# Allegro board ESP32_ENTREGABLE_1B_VILLARREAL_HERNANDEZ_707560.brd
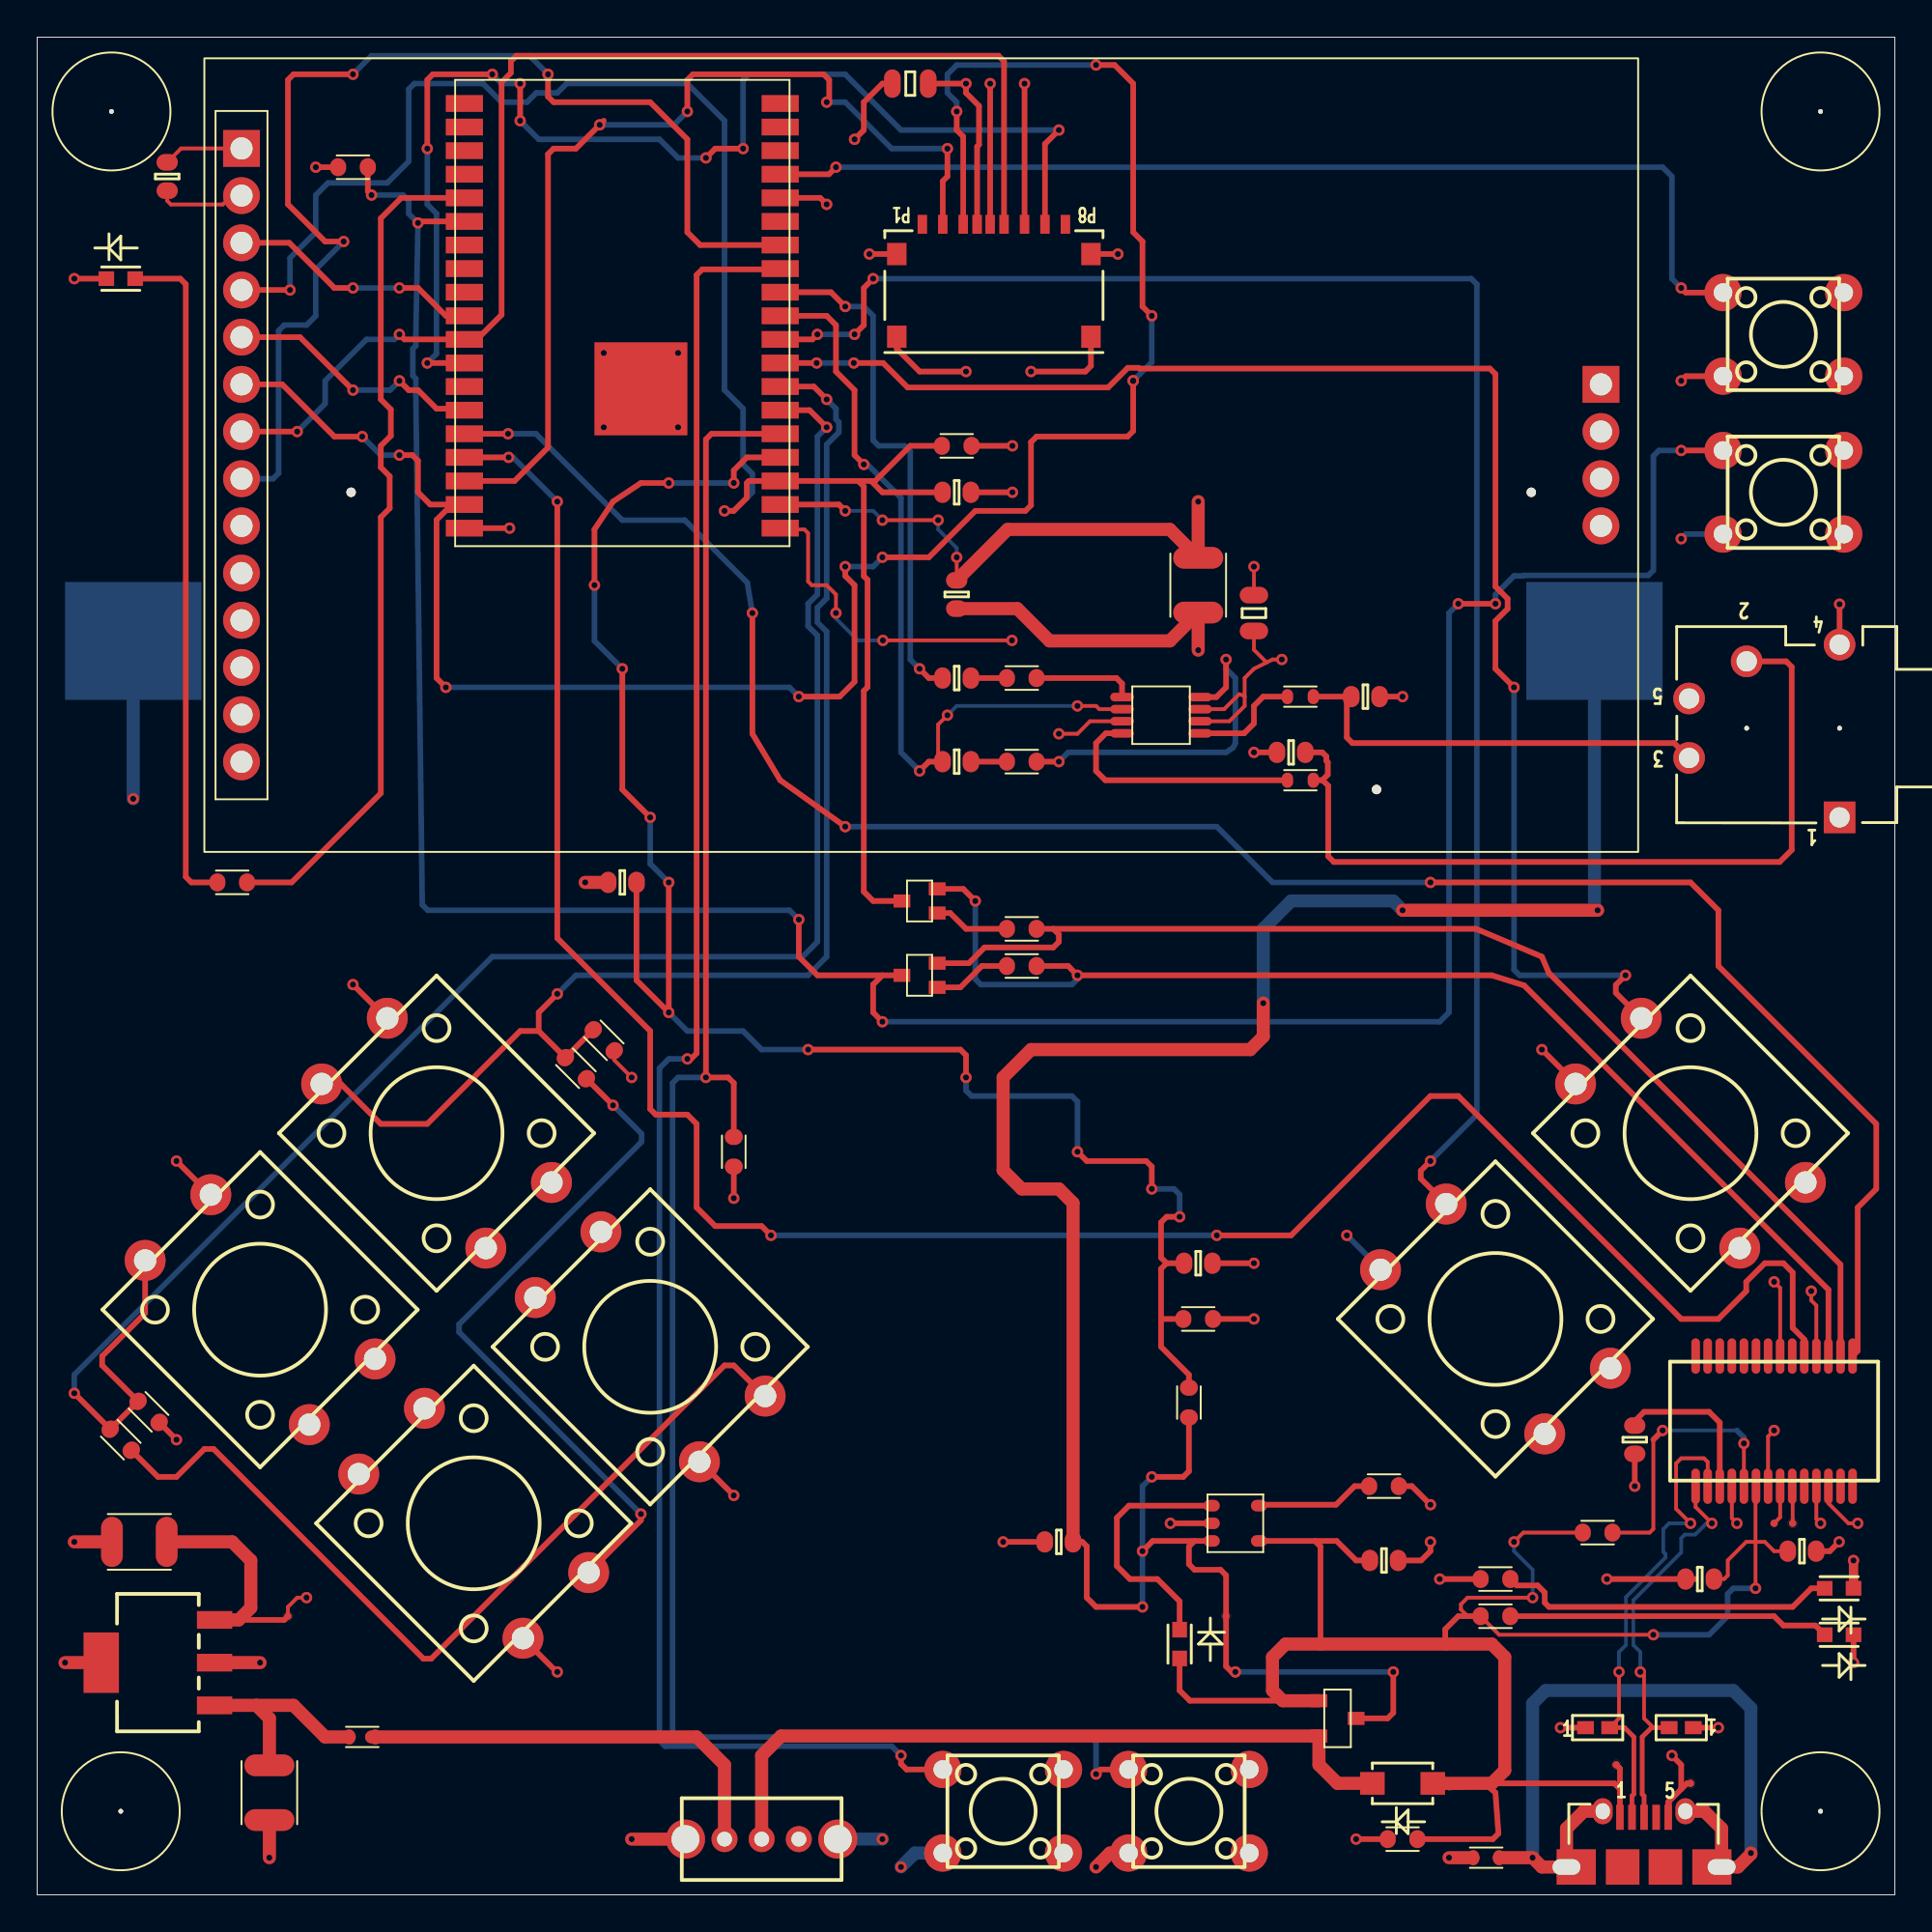
[diagram p0: board, top side]
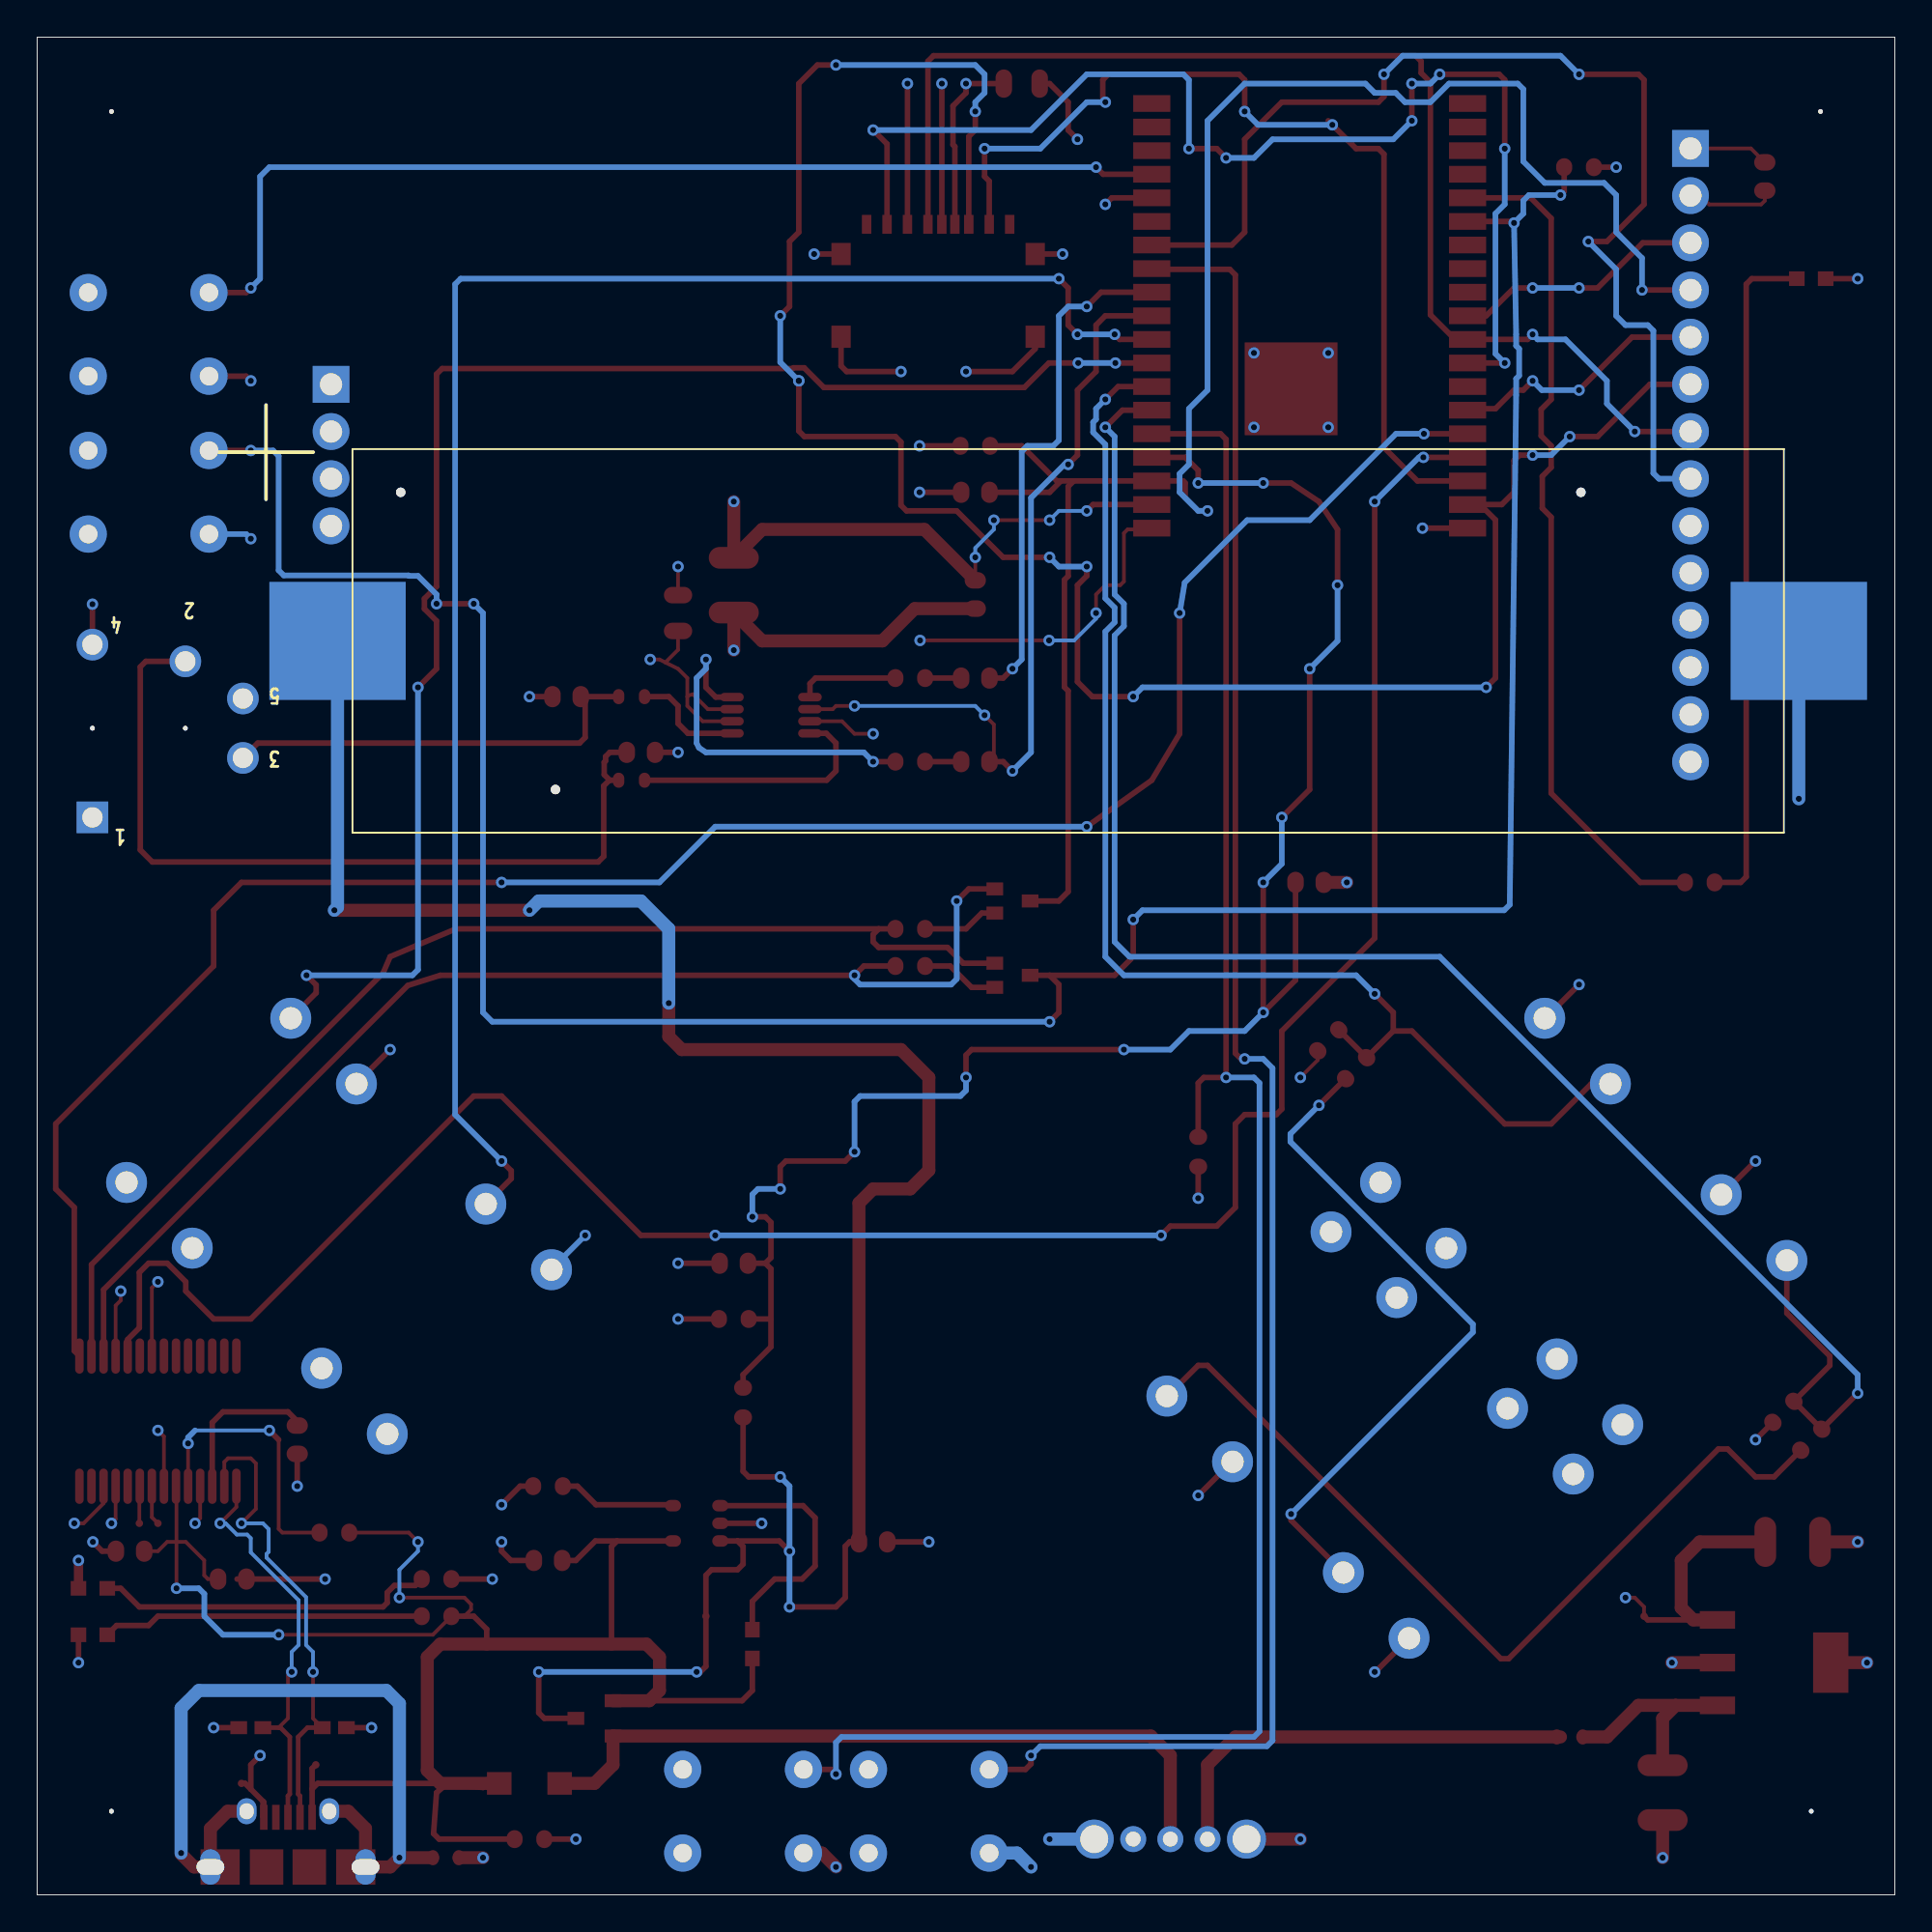
[diagram p1: board, bottom side, seen from below]

Outline 100 x 100 mm; copper layers: TOP, LAYER2, LAYER3, BOTTOM. Coordinates in mm from the lower left corner of the outline.
Outline path: 0,100 0,0 100,0 100,100 0,100

## Design rules (mm)
constraint set DEFAULT: 
net group USB_D: nets USB_DN USB_DP
net group EC_AUDIO: nets AUDIO_IN+ AUDIO_IN+_R AUDIO_IN- AUDIO_IN-_R AUDIO_OUT+ AUDIO_OUT+_L AUDIO_OUT- AUDIO_OUT-_L
net group EC_MISC: nets CBUS0 CBUS1 FT232_RST IO0 IO2 IO4 IO12 IO13 IO14 IO15 IO21 IO25 IO26 IO27 IO32 IO33 IO34 IO34_R IO35 IO35_R IO36 IO39 ISEN_CHRGR RESET STATUS_LED
net group EC_UART: nets DTR_N DTR_N_R RTS_N RTS_N_R UART_RXD UART_TXD
net group GND: nets GND_SHLD
net group MG_SPI: nets SPI_CS0 SPI_CS1 SPI_MISO SPI_MOSI SPI_SCK
net group PWR: nets FT232_P3V3OUT P3V7_VBAT P5V0_P3V7 P5V0_P3V7_IN P5V0_P3V7_L P5V0_USB

## Placement (name value [footprint] x y rotation side)
C1  0.1uF  [CC0603_OV]  62.5 34 180 top
C2  0.1uF  [CC0603_OV]  55 19 0 top
C3  47uF  [CC1210_OV]  12.5 5.5 90 top
C4  47uF  [CC1210_OV]  5.5 19 0 top
C5  4.7uF  [CC0603_OV]  72.5 18 180 top
C6  47uF  [CC1210_OV]  62.5 70.5 90 top
C7  0.1uF  [CC0603_OV]  49.5 70 90 top
C8  0.1uF  [CC0603_OV]  31.5 54.5 0 top
C9  0.1uF  [CC0603_OV]  49.5 75.5 180 top
C11  4.7uF  [CC0603_OV]  95 18.5 180 top
C12  0.1uF  [CC0603_OV]  89.5 17 0 top
C13  0.1uF  [CC0603_OV]  86 24.5 270 top
C15  10uF  [CC0805_OV]  47 97.5 0 top
C16  0.1uF  [CC0603_OV]  7 92.5 90 top
C18  0.1uF  [CC0603_OV]  49.5 65.5 0 top
C19  0.1uF  [CC0603_OV]  49.5 61 0 top
C20  220pF  [CC0603_OV]  71.5 64.5 180 top
C21  220pF  [CC0603_OV]  67.5 61.5 0 top
C22  10uF  [CC0805_OV]  65.5 69 270 top
D1  598-8060-107F  [LED_0603]  61.5 13.5 90 top
D2  MBR120VLSFT1G  [SOD-123]  73.5 6 180 top
D3  0402ESDA-MLP1  [0402_MLP]  88.5 9 180 top
D4  0402ESDA-MLP1  [0402_MLP]  84 9 0 top
D5  598-8060-107F  [LED_0603]  4.5 87 180 top
D6  598-8010-107F  [LED_0603]  97 16.5 0 top
D7  598-8010-107F  [LED_0603]  97 14 0 top
J1  47589-0001  [CON5_MICROUSB]  86.5 1.5 0 top
J2  SJ-43515TS  [CON5_AUD_JACK_RA_TH_SJ-43515TS]  97.02 58 180 top
J4  2.4" 240x320 SPI TFT ILI9341 with SD  [TFT_2P4_INCH_18PIN]  11 77.5 0 top
J5  1050270001  [CON8_SDCARD_PUSH_SM]  51.5 86 180 top
J6  1042P  [1042P_BAT_HLDR]  44.5 67.5 0 bottom
L1  330  [L0603_OV]  17.5 8.5 180 top
L2  330  [L0603_OV]  78 2 0 top
L3  330  [L0603_OV]  68 64.5 180 top
L4  330  [L0603_OV]  68 60 180 top
NOREF  -  [unnamed]  4.5 4.5 0 top
NOREF#2  -  [unnamed]  4 96 0 top
NOREF#3  -  [unnamed]  96 96 0 top
NOREF#4  -  [unnamed]  96 4.5 0 top
Q1  SSF1341  [SOT23-3]  70 9.5 0 top
Q2  MMBT3904WT1G  [SOT323]  47.5 53.5 180 top
Q3  MMBT3904WT1G  [SOT323]  47.5 49.5 180 top
R1  2K  [R0603_OV]  72.5 22 180 top
R2  2K  [R0603_OV]  78.5 15 0 top
R3  2K  [R0603_OV]  78.5 17 0 top
R4  100K  [R0603_OV]  62 26.5 270 top
R5  100K  [R0603_OV]  62.5 31 180 top
R6  100K  [R0603_OV]  73.5 3 0 top
R7  10K  [R0603_OV]  49.5 78 0 top
R8  10K  [R0603_OV]  53 52 0 top
R9  10K  [R0603_OV]  53 50 0 top
R10  2K  [R0603_OV]  10.5 54.5 180 top
R14  10K  [R0603_OV]  84 19.5 180 top
R15  100K  [R0603_OV]  53 61 0 top
R16  100K  [R0603_OV]  53 65.5 0 top
R17  10K  [R0603_OV]  30.5 46 135 top
R18  10K  [R0603_OV]  29 44.5 135 top
R19  10K  [R0603_OV]  6 26 135 top
R20  10K  [R0603_OV]  4.5 24.5 135 top
R21  10K  [R0603_OV]  37.5 40 270 top
R22  10K  [R0603_OV]  17 93 180 top
SW1  OS102011MA1QN1  [SLIDE_SWITCH]  39 3 90 top
SW2  DTS-21N-V  [SWITCH_12X12]  21.5 41 315 top
SW3  DTS-21N-V  [SWITCH_12X12]  23.5 20 135 top
SW4  DTS-21N-V  [SWITCH_12X12]  12 31.5 315 top
SW5  DTS-21N-V  [SWITCH_12X12]  33 29.5 135 top
SW6  PTS645SH432LFS  [SWITCH_6X6]  94 84 0 top
SW7  PTS645SH432LFS  [SWITCH_6X6]  94 75.5 0 top
SW8  PTS645SH432LFS  [SWITCH_6X6]  52 4.5 0 top
SW9  PTS645SH432LFS  [SWITCH_6X6]  62 4.5 0 top
SW10  DTS-21N-V  [SWITCH_12X12]  78.5 31 315 top
SW11  DTS-21N-V  [SWITCH_12X12]  89 41 315 top
TP1  TestPoint 40  [TP]  89 6 0 top
TP2  TestPoint 40  [TP]  85 7 0 top
TP3  TestPoint 40  [TP]  64 15 0 top
TP4  TestPoint 40  [TP]  13.5 15 0 top
TP5  TestPoint 40  [TP]  93.5 20 0 top
TP6  TestPoint 40  [TP]  94.5 20 0 top
U4  FT232R  [SSOP28]  93.5 25.5 270 top
U6  XC6802A42XMR-G  [SOT23-5]  64.5 20 0 top
U7  MCP1825ST-3302E/DB  [SOT223-4A]  6.5 12.5 180 top
U8  ESP32-WROVER-B (16Mb)  [LCC39_WROVERB]  31.5 85 180 top
U9  PAM8304ASR  [MSOP8]  60.5 63.5 180 top

## Library data of the parts
C1 C2 C7-C9 C12 C13 C16 C18 C19 = CAP SMD 0.1uF 16V 10% X7R 0603
C3 C4 C6 = CAP SMD 47uF 16V 20% X5R 1210
C5 C11 = CAP SMD 4.7uF 16V 10% X7S 0603
C15 C22 = CAP SMD 10uF 10V X7R 0805
C20 C21 = CAP SMD 220pF 50V 10% X7R 0603
D1 D5-D7 = LED SMD YLW/GRN 0603
D2 = DIODE MBR120VLSFT1G SOD123
D3 D4 = DIODE TVS BIDIR 0402
J1 = CONN Micro USB Type AB
J2 = Audio Jack 3.5mm SJ-43515TS
J4 = TFT2.4_SPI_18pin
J5 = CON8_SDCARD_SW_0
J6 = 1042P_BATTERY_HOLDER
L1-L4 = IND FER-BEAD 330 1.7A 0603
Q1 = TRANS P-CH 12V 3_3.5A SOT23
Q2 Q3 = TRANS BJT NPN 40V 0_0.2A SOT323
R1-R3 R10 = RES SMD 2K 5% 0_0.1W 0603
R4-R6 R15 R16 = RES SMD 100K 5% 0_1.1W 0603
R7-R9 R14 R17-R22 = RES SMD 10K 5% 0_1.25W 0603
SW1 = SW OS102011MA1QN1
SW2-SW5 SW10 SW11 = PUSHBUTTON_DTS-21N-V_12X12
SW6-SW9 = PUSHBUTTON_PTS645SH432LFS_6x6
TP1-TP6 = TestPoint 40_0
U4 = TMP_0
U6 = XC6802A42XMR-G_0
U7 = MCP1825S
U8 = ESP32_WROVER-B_2
U9 = PAM8304ASR

## Footprints (pads in the part's own frame, mm; a bottom-side part is the same pattern mirrored in y, then rotated)
0402_MLP
  rect 0.9x0.7 smd: 1(-0.65,0) 2(0.65,0)
1042P_BAT_HLDR
  round 0.5 hole 3.45: (-27.6,-8) (27.6,8)
  round 0.5 hole 3: (35.93,-8)
  rect 7.34x6.35 smd: 1(-39.33,0) 2(39.33,0)
CC0603_OV
  oval 0.889x1.143 smd: 1(-0.762,0) 2(0.762,0)
CC0805_OV
  oval 0.889x1.524 smd: 1(-0.965,0) 2(0.965,0)
CC1210_OV
  oval 1.168x2.692 smd: 1(-1.473,0) 2(1.473,0)
CON5_AUD_JACK_RA_TH_SJ-43515TS
  round 0.254 hole 1.092 unplated: (0,-4.8) (5,-4.8)
  rect 1.702x1.702 hole 1.092: 1(0,0)
  round 1.702 hole 1.092: 2(5,-8.4) 3(8.1,-3.2) 4(0,-9.3) 5(8.1,-6.4)
CON5_MICROUSB
  rect 1.803x1.905 smd: (-1.15,0) (1.15,0)
  rect 0.406x1.346 smd: 1(-1.3,2.675) 2(-0.65,2.675) 3(0,2.675) 4(0.65,2.675) 5(1.3,2.675)
  oval 1.067x1.397 hole 0.762x0.864: S1(-2.225,3) S2(2.225,3)
  rect 2.108x1.905 hole 1.499x0.838: S3(-4.175,0) S4(4.175,0)
CON8_SDCARD_PUSH_SM
  rect 0.508x1.016 smd: G1(0.2,-3.925) P1(3.85,-3.925) P2(2.75,-3.925) P3(1.65,-3.925) P4(0.9,-3.925) P5(-0.55,-3.925) P6(-1.65,-3.925) P7(-2.75,-3.925) P8(-3.85,-3.925)
  rect 1.041x1.194 smd: S1(5.225,-2.325) S2(5.225,2.125) S3(-5.225,2.125) S4(-5.225,-2.325)
L0603_OV
  oval 0.61x0.813 smd: 1(-0.698,0) 2(0.698,0)
LCC39_WROVERB
  rect 2x0.9 smd: 1(-8.5,11.43) 2(-8.5,10.16) 3(-8.5,8.89) 4(-8.5,7.62) 5(-8.5,6.35) 6(-8.5,5.08) 7(-8.5,3.81) 8(-8.5,2.54) 9(-8.5,1.27) 10(-8.5,0) 11(-8.5,-1.27) 12(-8.5,-2.54) 13(-8.5,-3.81) 14(-8.5,-5.08) 15(-8.5,-6.35) 16(-8.5,-7.62) 17(-8.5,-8.89) 18(-8.5,-10.16) 19(-8.5,-11.43) 20(8.5,-11.43) 21(8.5,-10.16) 22(8.5,-8.89) 23(8.5,-7.62) 24(8.5,-6.35) 25(8.5,-5.08) 26(8.5,-3.81) 27(8.5,-2.54) 28(8.5,-1.27) 29(8.5,0) 30(8.5,1.27) 31(8.5,2.54) 32(8.5,3.81) 33(8.5,5.08) 34(8.5,6.35) 35(8.5,7.62) 36(8.5,8.89) 37(8.5,10.16) 38(8.5,11.43)
  rect 5x5 smd: 39(-1,3.93)
LED_0603
  rect 0.838x0.787 smd: A(-0.775,0) C(0.775,0)
MSOP8
  oval 1.27x0.46 smd: 1(-2.1,0.975) 2(-2.1,0.325) 3(-2.1,-0.325) 4(-2.1,-0.975) 5(2.1,-0.975) 6(2.1,-0.325) 7(2.1,0.325) 8(2.1,0.975)
R0603_OV
  oval 0.864x0.965 smd: 1(-0.8,0) 2(0.8,0)
SLIDE_SWITCH
  round 1.4 hole 0.8: 1(0,2) 2(0,0) 3(0,-2)
  round 2.1 hole 1.5: MH1(0,4.1) MH2(0,-4.1)
SOD-123
  rect 1.321x1.219 smd: A(-1.626,0) C(1.626,0)
SOT23-3
  rect 0.9x0.7 smd: 1(-1,0.95) 2(-1,-0.95) 3(1,0)
SOT23-5
  oval 0.87x0.62 smd: 1(-1.275,0.95) 2(-1.275,0) 3(-1.275,-0.95) 4(1.275,-0.95) 5(1.275,0.95)
SOT223-4A
  rect 1.9x0.95 smd: 1(-3.05,2.3) 2(-3.05,0) 3(-3.05,-2.3)
  rect 1.9x3.25 smd: 4(3.05,0)
SOT323
  rect 0.9x0.7 smd: 1(-0.95,0.65) 2(-0.95,-0.65) 3(0.95,0)
SSOP28
  oval 1.9x0.46 smd: 1(-3.505,4.225) 2(-3.505,3.575) 3(-3.505,2.925) 4(-3.505,2.275) 5(-3.505,1.625) 6(-3.505,0.975) 7(-3.505,0.325) 8(-3.505,-0.325) 9(-3.505,-0.975) 10(-3.505,-1.625) 11(-3.505,-2.275) 12(-3.505,-2.925) 13(-3.505,-3.575) 14(-3.505,-4.225) 15(3.505,-4.225) 16(3.505,-3.575) 17(3.505,-2.925) 18(3.505,-2.275) 19(3.505,-1.625) 20(3.505,-0.975) 21(3.505,-0.325) 22(3.505,0.325) 23(3.505,0.975) 24(3.505,1.625) 25(3.505,2.275) 26(3.505,2.925) 27(3.505,3.575) 28(3.505,4.225)
SWITCH_6X6
  round 2 hole 1: 1(-3.25,2.25) 2(3.25,2.25) 3(-3.25,-2.25) 4(3.25,-2.25)
SWITCH_12X12
  round 2.2 hole 1.2: 1(-6.25,2.5) 2(6.25,2.5) 3(-6.25,-2.5) 4(6.25,-2.5)
TFT_2P4_INCH_18PIN
  rect 1.981x1.981 hole 1.194: 1(0,16.51) 15(73.18,3.81)
  round 1.981 hole 1.194: 2(0,13.97) 3(0,11.43) 4(0,8.89) 5(0,6.35) 6(0,3.81) 7(0,1.27) 8(0,-1.27) 9(0,-3.81) 10(0,-6.35) 11(0,-8.89) 12(0,-11.43) 13(0,-13.97) 14(0,-16.51) 16(73.18,1.27) 17(73.18,-1.27) 18(73.18,-3.81)
TP
  round 0.4 smd: 1(0,0)
unnamed
  round 0.254 hole 3.175 unplated: (0,0)

## Nets
GND: C1.1 C2.1 C3.1 C4.1 C5.1 C6.1 C7.1 C8.1 C9.1 C11.1 C12.1 C13.2 C15.1 C16.1 C20.1 C21.1 C22.1 D3.1 D4.1 D5.C(CATHODE) D6.C(CATHODE) D7.C(CATHODE) J1.5 J2.4 J4.2 J5.G1 J5.P6(VSS) J5.S1 J5.S2 J5.S3 J5.S4 J6.1(-) L2.1 R1.1 R5.1 R6.1 R17.1 R19.1 SW1.MH1 SW1.MH2 SW6.3 SW7.3 SW8.3 SW9.3 SW10.3 SW11.3 TP1.1(PIN1) U4.7 U4.18 U4.21 U4.25 U4.26 U6.2 U7.2 U7.4 U8.1 U8.15 U8.38 U8.39 U9.7
GND_SHLD: J1.S1 J1.S2 J1.S3 J1.S4(SHLD4) L2.2
P3V3: C4.2 C6.2 C7.2 C15.2 C16.2 C22.2 J4.1(VCC) J5.P4 R3.1 R7.2 R21.2 R22.2 SW2.1 SW3.1 SW4.1 SW5.1 TP4.1(PIN1) U4.4(VCCIO) U7.3(VOUT) U8.2 U9.2 U9.3
P3V7_VBAT: C2.2 J6.2 Q1.3 R4.2 TP3.1(PIN1) U6.3
P5V0_P3V7: D2.C Q1.2(S) SW1.2
P5V0_P3V7_IN: C3.2 L1.2 U7.1
P5V0_P3V7_L: L1.1 SW1.1
P5V0_USB: C5.2 C11.2 C12.2 D1.A D2.A J1.1 Q1.1 R2.1 R6.2 R14.2 TP2.1(PIN1) U4.20 U6.4
AUDIO_IN+: R16.2 U9.5
AUDIO_IN+_R: C18.2 R16.1
AUDIO_IN-: R15.2 U9.4
AUDIO_IN-_R: C19.2 R15.1
AUDIO_OUT+: C20.2 J2.3 L3.1
AUDIO_OUT+_L: L3.2 U9.1
AUDIO_OUT-: C21.2 J2.2 L4.1
AUDIO_OUT-_L: L4.2 U9.8
CBUS0: TP6.1(PIN1) U4.23
CBUS1: TP5.1(PIN1) U4.22
DTR_N: Q3.2(E) R8.2 U4.2
DTR_N_R: Q2.1 R8.1
FT232_P3V3OUT: C13.1 U4.17
FT232_RST: R14.1 U4.19
IO0: Q3.3 R22.1 SW7.1 U8.25
IO2: R10.1 U8.24
IO4: U8.26
IO12: U8.14
IO13: SW6.1 U8.16
IO14: J4.8 U8.13
IO15: U8.23
IO21: J4.5 U8.33
IO25: C19.1 U8.10 U9.6(\S\D)
IO26: C18.1 U8.11
IO27: SW8.1 U8.12
IO32: SW11.1 U8.8
IO33: SW10.1 U8.9
IO34: R19.2 R20.2 SW4.3 U8.6
IO34_R: R20.1 SW5.3
IO35: R17.2 R18.2 SW2.3 U8.7
IO35_R: R18.1 SW3.3
IO36: C1.2 C8.2 R4.1 R5.2 U8.4
IO39: R21.1 SW9.1 U8.5
ISEN_CHRGR: R1.2 U6.5
RESET: C9.2 J4.4 Q2.3 R7.1 U8.3
RTS_N: Q2.2(E) R9.2 U4.3
RTS_N_R: Q3.1 R9.1
SPI_CS0: J4.3 U8.29
SPI_CS1: J5.P2 U8.36
SPI_MISO: J5.P7 U8.31
SPI_MOSI: J4.6 J5.P3 U8.37
SPI_SCK: J4.7 J5.P5 U8.30
STATUS_LED: D5.A R10.2
UART_RXD: U4.1 U8.34
UART_TXD: U4.5 U8.35(TXD0)
USB_DN: D4.2(A2) J1.2 U4.16
USB_DP: D3.2(A2) J1.3 U4.15
N00559: D1.C(CATHODE) U6.1(\C\H\G)
N254022: D6.A R3.2
N255207: D7.A R2.2

Pads without a net: J1 4; J2 1 5; J4 9 10 11 12 13 14 15 16 17 18; J5 P1 P8; SW1 3; SW2 2 4; SW3 2 4; SW4 2 4; SW5 2 4; SW6 2 4; SW7 2 4; SW8 2 4; SW9 2 4; SW10 2 4; SW11 2 4; U4 6 8 9 10 11 12 13 14 24 27 28; U8 17 18 19 20 21 22 27 28 32

## Via types
v1: diameter 0.61, hole 0.33, TOP to BOTTOM, 191 vias

## Routing (per net, layer and track width the routed paths; a pad name or vN(x,y) marks a point on that pad's centre or on a via; arc(x,y) is an arc through that point)
GND: length 223.5
  TOP w0.2: R17.1 31.07,44.93 v1(32,44) ; v1(96,20) 95.78,20.23 U4.25 ; U4.18 91.22,20.27 v1(91.5,20) ; v1(45.53,67.53) v1(52.47,67.53) ; v1(93.5,25) 93.17,24.68 U4.21 ; v1(98,20) 97.5,20 96.42,21.07 U4.26 ; U9.7 56.67,63.17 56,62.5 v1(55,62.5) ; U4.7 93.83,32.67 v1(93.5,33) ; C16.1 7,91.19 7.2,90.99 9.99,90.99 10.47,91.47 ; v1(43,69) 43,70 42.5,70.5 41.7,70.5 41.5,70.7 41.5,73.3 41.3,73.5 40.07,73.5 U8.1 ; C22.1 v1(65.5,71.5)
  TOP w0.3: C13.2 v1(86,22) ; v1(53.15,97.5) J5.P6 ; v1(50,82) 47.5,82 46.27,83.22 J5.S2 ; D3.1 v1(90.5,9) ; 88.5,5.69 88.81,6 TP1.1 ; 88.5,5.69 87.84,5.03 ; 88.5,5.69 88.5,7 v1(88,7.5) ; J5.S4 v1(58.17,88.33) ; R5.1 v1(65.5,31) ; v1(51.3,97.5) J5.G1 ; v1(75,19) 75,18.5 74.5,18 C5.1 ; C9.1 v1(52.5,75.5) ; v1(44,94.5) 44.5,95 44.5,96.5 45.5,97.5 C15.1 ; 87.84,5.03 87.84,4.22 J1.5 87.8,4.99 87.84,5.03 ; 89.24,17 C12.1 v1(84.5,17) ; C20.1 v1(73.5,64.5) ; U8.38 v1(25.43,73.57) ; 10.47,91.47 J4.2 ; SW11.3 82.81,43.69 v1(81,45.5) ; v1(75,21) 74,22 R1.1 ; R6.1 v1(71,3) ; C1.1 v1(65.5,34) ; U6.2 v1(61,20) ; C21.1 v1(65.5,61.5) ; D7.C v1(97.78,12.5) ; v1(53.5,82) 56.42,82 56.73,82.3 J5.S3 ; v1(42.5,91) 42.15,91.35 U8.15 ; R19.1 v1(7.5,24.5) ; C2.1 v1(52,19) ; D5.C v1(2,87) ; SW6.3 88.75,81.75 v1(88.5,81.5) ; D4.1 v1(82,9) ; J5.S1 v1(44.8,88.33) ; C11.1 96.5,18.5 v1(97,19) ; J2.4 v1(97.02,69.48)
  TOP w0.5: D6.C v1(97.78,18)
  TOP w0.7: U7.2 v1(12,12.5) ; SW1.MH1 v1(32,3) ; v1(62.5,67) C6.1 60.97,67.5 54.5,67.5 52.76,69.24 C7.1 ; C4.1 v1(2,19) ; C3.1 v1(12.5,2) ; U7.4 v1(1.5,12.5) ; SW9.3 57.75,2.25 v1(57,1.5) ; C8.1 v1(29.5,54.5) ; L2.1 v1(76,2)
  LAYER2 w0.7: 33.6,3 SW1.MH1 ; SW1.MH1 34.9,1.7 ; SW1.MH1 34.9,4.3 ; 43.1,1.7 SW1.MH2 ; SW1.MH2 43.1,4.3 ; SW1.MH2 44.4,3 ; 89.5,73.25 SW7.3 ; SW7.3 92,73.25 ; SW7.3 90.75,72 ; SW7.3 90.75,74.5 ; J2.4 98.13,67.3 ; J2.4 95.92,67.3 ; J2.4 97.02,66.2 ; J2.4 97.02,68.4 ; SW11.3 84.17,43.65 ; SW11.3 82.81,45.01 ; SW11.3 82.81,42.3 ; SW11.3 81.46,43.65 ; 9.76,91.47 J4.2 12.24,91.47 ; SW6.3 92,81.75 ; SW6.3 89.5,81.75 ; SW6.3 90.75,80.5 ; SW6.3 90.75,83 ; SW10.3 72.31,35.01 ; SW10.3 72.31,32.3 ; SW10.3 70.96,33.65 ; SW10.3 73.67,33.65 ; v1(48.75,2.25) 48.75,3.5 ; v1(48.75,2.25) 50,2.25 ; v1(48.75,2.25) 47.5,2.25 ; 57.5,2.25 SW9.3 ; SW9.3 60,2.25 ; SW9.3 58.75,3.5
  BOTTOM w0.2: v1(43,69) 43,68.7 44.17,67.53 v1(45.53,67.53)
  BOTTOM w0.3: SW10.3 72.31,33.69 v1(70.5,35.5) ; v1(88.5,73) 88.75,73.25 SW7.3
  BOTTOM w0.7: SW1.MH2 v1(45.5,3) ; v1(46.5,1.5) 47.25,2.25 v1(48.75,2.25) ; J6.1 v1(5.17,59)
  vias: v1(30.5,83) v1(30.5,79) v1(34.5,83) v1(34.5,79)
GND_SHLD: length 43.1
  TOP w0.7: J1.S2 89.75,4.5 90.67,3.57 J1.S4 91.55,1.5 92.25,2.2 v1(92.25,2.25) ; J1.S1 83.25,4.5 82.33,3.57 J1.S3 81,1.5 v1(80.5,2) L2.2
  BOTTOM w0.7: v1(80.5,2) 80.5,10.3 81.2,11 91.3,11 92.25,10.05 v1(92.25,2.25)
P3V3: length 119.7
  TOP w0.2: U9.3 63.89,63.83 64.7,64.63 64.97,64.55 65,64.5 ; U4.4 95.78,31.73 95.5,32 v1(95.5,32.5) ; 66.18,66.34 65.5,66 65,65.5 65,64.5 ; 66.18,66.34 66.5,66.5 v1(67,66.5) ; 66.18,66.34 65.5,67.02 C22.2 ; 65,64.5 65,64 64.17,63.17 U9.2 ; C16.2 7.75,94.01 J4.1 ; v1(49.5,72) C7.2 49.5,70.47 ; v1(14.5,16) 14,16 13.5,15.5 TP4.1 ; v1(45.5,74) v1(48.5,74)
  TOP w0.3: v1(17,49) 18.81,47.19 SW2.1 ; SW5.1 35.69,23.31 v1(37.5,21.5) ; SW4.1 9.31,37.69 v1(7.5,39.5) ; R22.2 v1(15,93) ; R7.2 v1(52.5,78) ; R3.1 v1(75.5,17) ; R21.2 v1(37.5,37.5) ; v1(28,12) 27.96,12 SW3.1 ; 10.85,14.8 13.3,14.8 TP4.1 ; J5.P4 50.6,94.11 50.7,94.21 50.7,96.3 50,97 v1(50,97.5) C15.2 ; v1(43.5,74.5) 43.16,74.84 U8.2
  TOP w0.7: U7.3 10.85,14.8 11.5,15.45 11.5,18 10.5,19 C4.2 ; v1(62.5,75) C6.2 60.97,73.5 52.24,73.5 C7.2
  LAYER3 w0.3: 93,17 93,18 93.5,18.5 94.5,18.5
  LAYER3 w0.7: 9.35,36.33 SW4.1 ; SW4.1 9.35,39.04 ; SW4.1 8,37.69 ; SW4.1 10.7,37.69 ; 17.5,47.19 SW2.1 ; SW2.1 18.85,45.83 ; SW2.1 20.2,47.19 ; SW2.1 18.85,48.54 ; SW5.1 35.65,24.67 ; SW5.1 35.65,21.96 ; SW5.1 37.01,23.31 ; SW5.1 34.3,23.31 ; J4.1 12.24,94.01 ; J4.1 9.76,94.01 ; J4.1 11,95.25 ; 24.8,13.81 SW3.1 ; SW3.1 27.5,13.81 ; SW3.1 26.15,12.46 ; SW3.1 26.15,15.17
  BOTTOM w0.2: v1(48.5,74) 48.5,73.5 49.5,72.5 v1(49.5,72) ; v1(45.5,74) 45,74.5 v1(43.5,74.5)
P3V7_VBAT: length 126.8
  TOP w0.3: v1(60,22.5) 61.7,22.5 62,22.8 R4.2 ; v1(59.5,15.5) 57,15.5 56.5,16 56.5,18.76 56.26,19 C2.2 ; U6.3 62.3,19.05 ; 62.3,19.05 60.05,19.05 v1(59.5,18.5) ; 62.3,19.05 62,18.75 62,17.8 62.3,17.5 63.7,17.5 64,17.2 TP3.1 64,12.3 64.3,12 v1(64.5,12) ; Q1.3 72.7,9.5 73,9.8 v1(73,12)
  TOP w0.7: v1(73.5,53) v1(84,53) ; C2.2 55.76,37.24 55,38 53,38 52,39 52,44 53.5,45.5 65.3,45.5 66,46.2 v1(66,48)
  BOTTOM w0.3: v1(73,12) v1(64.5,12) ; v1(59.5,15.5) v1(59.5,18.5) 59.5,22 v1(60,22.5)
  BOTTOM w0.7: v1(73.5,53) 73,53.5 67.5,53.5 66,52 v1(66,48) ; J6.2 83.83,53.17 v1(84,53)
P5V0_P3V7: length 39.8
  TOP w0.7: D2.C 70,6 69,7 Q1.2 40.05,8.55 39,7.5 SW1.2
P5V0_P3V7_IN: length 11.5
  TOP w0.7: 11.8,10.2 13.8,10.2 15.5,8.5 L1.2 ; 11.8,10.2 U7.1 ; 11.8,10.2 12.5,9.5 C3.2
P5V0_P3V7_L: length 23.6
  TOP w0.7: SW1.1 37,7 35.5,8.5 L1.1 18,8.5
P5V0_USB: length 110.1
  TOP w0.2: v1(80.5,16) 77,16 76.64,15.64 76.64,15.36 77,15 ; v1(87,14) 78.7,14 R2.1 ; 92.5,19 92,19 91.01,18.01 91.01,17.2 90.81,17 C12.2 ; 92.5,19 92.5,21.97 U4.20 ; 92.5,19 93,19 93.5,18.5 C11.2 ; 92.5,19 v1(92.5,16.5) ; R14.2 80,19.5 v1(79.5,19)
  TOP w0.3: 85.2,5.7 85.2,6.8 TP2.1 ; 85.2,5.7 J1.1 ; 85.2,5.7 84.9,6 78.3,6 ; U6.4 68.78,19.05 ; 68.78,19.05 69.08,18.75 69.08,13.5 ; 68.78,19.05 69.95,19.05 71,18 C5.2 ; D1.A 61.5,11 62.05,10.45 67.05,10.45 ; R6.2 78.36,3 78.66,3.3 78.5,5.5 78,5.93 76,5.78 75.74,6 ; R2.1 76.5,15 75.8,14.3 75.8,13.5
  TOP w0.7: D2.A 78.3,6 79,6.7 79,12.8 78.3,13.5 67.2,13.5 66.5,12.8 66.5,11 67.05,10.45 Q1.1
  BOTTOM w0.2: v1(79.5,19) 79.5,18.5 80.5,17.5 v1(80.5,16)
  BOTTOM w0.3: v1(87,14) 90,14 91,15 91,16.2 91.3,16.5 v1(92.5,16.5)
AUDIO_IN+: length 5.4
  TOP w0.3: U9.5 58.4,65.2 58.1,65.5 R16.2
AUDIO_IN+_R: length 1.9
  TOP w0.3: C18.2 R16.1
AUDIO_IN-: length 19
  TOP w0.3: v1(64,66.5) 64,65 63.48,64.47 U9.4 ; R15.2 v1(55,61)
  BOTTOM w0.3: v1(64,66.5) 64,66 64.5,65.5 64.5,62 64.38,61.75 64,61.5 55.5,61.5 v1(55,61)
AUDIO_IN-_R: length 1.9
  TOP w0.3: C19.2 R15.1
AUDIO_OUT+: length 23.2
  TOP w0.3: J2.3 88.12,62 70.8,62 70.5,62.3 70.5,64.26 C20.2 L3.1
AUDIO_OUT+_L: length 6.1
  TOP w0.3: L3.2 66,64.5 65.5,64 65.5,63.06 64.97,62.52 U9.1
AUDIO_OUT-: length 45.1
  TOP w0.3: J2.2 94.15,66.4 94.45,66.1 94.45,56.25 93.8,55.6 69.8,55.6 69.5,55.9 69.5,59.7 69.2,60 69.17,60 ; 69.17,60 69.47,60.3 69.47,60.97 69.4,61.04 69.4,61.27 69.17,61.5 C21.2 ; 69.17,60 L4.1
AUDIO_OUT-_L: length 13.6
  TOP w0.3: L4.2 57.5,60 57,60.5 57,62 57.52,62.52 U9.8
CBUS0: length 2
  TOP w0.2: TP6.1 94.5,21.97 U4.23
CBUS1: length 2.1
  TOP w0.2: TP5.1 93.83,20.32 U4.22
DTR_N: length 63.4
  TOP w0.3: 54.7,52 77.45,52 81,50.5 81.38,49.62 97.08,33.92 U4.2 ; 54.7,52 R8.2 ; 54.7,52 55,51.7 55,51.3 54.7,51 51,51 50.15,50.15 Q3.2
DTR_N_R: length 4.1
  TOP w0.3: R8.1 50,52 49.15,52.85 Q2.1
FT232_P3V3OUT: length 9
  TOP w0.3: 86,25 C13.1 86,25.5 86.5,26 90,26 90.58,25.43 U4.17
FT232_RST: length 15
  TOP w0.2: 87,24.5 87,19.7 86.8,19.5 R14.1 ; v1(91.88,24.3) U4.19
  TOP w0.3: 87,24.5 v1(87.5,25)
  BOTTOM w0.2: v1(87.5,25) 91.5,25
  BOTTOM w0.3: 91.5,25 91.88,24.62 v1(91.88,24.3)
IO0: length 150.4
  TOP w0.3: R22.1 17.8,91.7 v1(18,91.5) ; v1(20.5,90) 20.58,90.08 U8.25 ; v1(76.5,69.5) v1(78.5,69.5) ; v1(88.5,77.75) SW7.1 ; 45.5,49.5 45,49 45,47.5 v1(45.5,47) ; 45.5,49.5 42,49.5 41,50.5 v1(41,52.5) ; 45.5,49.5 Q3.3
  BOTTOM w0.3: v1(78.5,69.5) 78.5,70 79.5,71 79.99,71 80.02,71.03 86.72,71.03 87,71.3 87,77.45 87.3,77.75 v1(88.5,77.75) ; v1(45.5,47) 75.5,47 76,47.5 76,69 v1(76.5,69.5) ; v1(18,91.5) 19.7,91.5 20,91.2 20,90.5 v1(20.5,90) 20.39,84 20.39,83.39 20.22,83.22 20.22,81.78 20.39,81.61 20.39,80.73 20.73,53.3 21.03,53 40.5,53 v1(41,52.5)
IO2: length 45.9
  TOP w0.3: R10.1 13.7,54.5 18.5,59.3 18.5,74.16 18.98,74.64 18.98,76.36 18.5,76.84 18.5,78 19.04,78.54 19.04,79.96 18.5,80.5 18.5,90.25 19.6,91.35 U8.24
IO13: length 56.9
  TOP w0.3: SW6.1 88.75,86.25 v1(88.5,86.5) ; v1(43,93) 42.62,92.62 U8.16
  BOTTOM w0.3: v1(88.5,86.5) 88,87 88,92.5 87.5,93 v1(43,93)
IO14: length 62.2
  TOP w0.3: v1(17,98) 13.8,98 13.5,97.7 13.5,91 15.5,89 v1(16.5,89) ; U8.13 35.69,88.81 35,89.5 35,94.5 33,96.5 27.8,96.5 27.5,96.8 v1(27.5,98)
  BOTTOM w0.3: v1(27.5,98) 26.5,99 18,99 v1(17,98) ; v1(16.5,89) 15,87.5 15,85 14.5,84.5 13.3,84.5 13,84.2 13,76.53 12.7,76.23 v1(11,76.23)
IO21: length 14
  TOP w0.3: J4.5 14.15,83.85 v1(17,81) ; v1(19.5,81.5) 20,81 20.5,81 21.5,80 22.92,80 U8.33
  BOTTOM w0.3: v1(17,81) 19,81 v1(19.5,81.5)
IO25: length 43.1
  TOP w0.2: 48.5,61.24 48.5,63 v1(49,63.5) ; U9.6 57.18,63.83 57,64 v1(56,64)
  TOP w0.3: v1(44.5,77) 44,77.5 44,81 43,82 43,84.5 42.5,85 U8.10 ; 48.5,61.24 C19.1 48,61 v1(47.5,60.5)
  BOTTOM w0.2: v1(49,63.5) 49.5,64 v1(56,64)
  BOTTOM w0.3: v1(47.5,60.5) 46.5,61.5 46.5,75.2 44.7,77 v1(44.5,77)
IO26: length 27.9
  TOP w0.3: v1(47.5,66) 48,65.5 C18.1 48.8,65.5 ; U8.11 42.73,86.27 v1(43.5,85.5)
  BOTTOM w0.3: v1(43.5,85.5) 44.5,85.5 45,85 45,78.3 45.3,78 46.7,78 47,77.7 47,66.5 v1(47.5,66)
IO27: length 101.2
  TOP w0.3: v1(46.5,7.5) 46.5,7.05 46.8,6.75 SW8.1 ; U8.12 39.96,87.5 35.8,87.5 35.5,87.2 35.5,45.3 35.2,45 v1(35,45)
  BOTTOM w0.3: v1(46.5,7.5) 46,8 33.8,8 33.5,8.3 33.5,44.5 34,45 v1(35,45)
IO32: length 81.9
  TOP w0.3: v1(79.5,65) 78.5,66 78.5,68.57 79.16,69.23 79.16,69.77 78.5,70.43 78.5,81.86 78.2,82.16 59.33,82.16 59.29,82.2 58.71,82.2 57.65,81.14 46.86,81.14 45.54,82.46 v1(43.96,82.46) ; SW11.1 84.98,48.55 84.98,48.98 v1(85.5,49.5) ; U8.8 v1(41.96,82.46)
  BOTTOM w0.3: v1(41.96,82.46) v1(43.96,82.46) ; v1(79.5,65) 79.5,49.8 79.8,49.5 v1(85.5,49.5)
IO33: length 91.5
  TOP w0.3: v1(75,39.5) 74.48,38.98 74.48,38.55 SW10.1 ; v1(45,87) 44.5,86.5 44.5,84.5 v1(44,84) ; U8.9 41.73,83.73 v1(42,84)
  BOTTOM w0.3: v1(42,84) v1(44,84) ; v1(75,39.5) 77.5,42 77.5,86.7 77.2,87 v1(45,87)
IO34: length 96.1
  TOP w0.3: U8.6 41.58,79.92 v1(42.5,79) ; v1(2,27) R20.2 R19.2 3.5,28.5 3.5,29 5.81,31.31 SW4.3
  BOTTOM w0.3: v1(2,27) 2,28 24.5,50.5 41.2,50.5 42,51.3 42,67.79 41.5,68.29 41.5,69.5 42,70 42,78.5 v1(42.5,79)
IO34_R: length 47.2
  TOP w0.3: SW5.3 39.15,26.85 37.5,28.5 37,28.5 21.21,12.71 20.79,12.71 9.5,24 9,24 7.5,22.5 6.5,22.5 R20.1
IO35: length 70.3
  TOP w0.3: v1(28,48.5) 27,47.5 27,46.5 ; 27,46.5 R18.2 R17.2 ; 27,46.5 26,46.5 21,41.5 18.5,41.5 16.35,43.65 SW2.3 ; U8.7 41.81,81.19 v1(42.5,80.5)
  BOTTOM w0.3: v1(42.5,80.5) 43,80 43,79.43 43.16,79.27 43.16,78.73 42.5,78.07 42.5,69.79 42,69.29 42,68.5 42.5,68 42.5,50.5 41.5,49.5 29,49.5 v1(28,48.5)
IO35_R: length 37.1
  TOP w0.3: 29.69,17.31 SW3.3 32.5,20.16 v1(32.5,20.5) ; v1(31,42.5) R18.1
  BOTTOM w0.3: v1(32.5,20.5) 22.71,30.29 22.71,30.71 32.54,40.54 32.54,40.96 v1(31,42.5)
IO36: length 96.6
  TOP w0.3: v1(41.5,45.5) 49.7,45.5 50,45.2 v1(50,44) ; v1(30,70.5) 30,73.5 31,75 32.5,76 v1(34,76) ; v1(60,38) 60,39.2 59.7,39.5 56.5,39.5 v1(56,40) ; v1(34,54.5) v1(34,47.5) 32.26,49.24 C8.2 ; 60.8,34 60.5,34.3 60.5,36.2 60.8,36.5 v1(61.5,36.5) ; 60.8,34 60.5,33.7 60.5,31 ; 60.8,34 C1.2 ; U8.4 38.2,77.38 37.5,76.68 v1(37.5,76) ; 60.5,31 R5.2 ; 60.5,31 60.5,29.5 62,28 R4.1 ; v1(31.5,66) 31.5,59.5 v1(33,58)
  BOTTOM w0.3: v1(34,47.5) 35,46.5 38,46.5 39,45.5 v1(41.5,45.5) ; v1(56,40) 56,42.7 55.7,43 50.3,43 50,43.3 v1(50,44) ; v1(33,58) 33,55.5 v1(34,54.5) ; v1(30,70.5) 30,67.5 v1(31.5,66) ; v1(34,76) v1(37.5,76) ; v1(60,38) 61.2,38 61.5,37.7 v1(61.5,36.5)
IO39: length 106.4
  TOP w0.3: R21.1 37.5,43.7 37.2,44 v1(36,44) 36,78.35 36.3,78.65 U8.5 ; v1(57,6.5) 57.25,6.75 SW9.1
  BOTTOM w0.3: v1(36,44) 34.5,44 34.2,43.7 34.2,8.8 34.5,8.5 56.7,8.5 57,8.2 v1(57,6.5)
ISEN_CHRGR: length 6.4
  TOP w0.3: R1.2 70.92,22 69.92,21 65.83,21 U6.5
RESET: length 101.6
  TOP w0.3: 44.2,76.11 U8.3 38.31,76.11 38.2,76 38.2,75.2 37.5,74.5 v1(37,74.5) ; 44.2,76.11 44.89,76.11 ; 44.2,76.11 44.5,75.81 44.5,70.99 44.7,70.79 44.7,65.01 44.5,64.81 44.5,54 45,53.5 Q2.3 ; 44.89,76.11 45.11,76.11 47,78 R7.1 ; 44.89,76.11 45.5,75.5 C9.2 ; J4.4 v1(13.61,86.39)
  BOTTOM w0.3: v1(37,74.5) 37.5,74.5 38.5,75.5 38.5,76.5 38,77 38,80 37,81 37,95.5 35,97.5 28.5,97.5 28,97 26.87,97 26.37,96.5 25,96.5 24,97.5 20.3,97.5 20,97.2 20,93.31 18.84,92.16 15.65,92.16 15,91.5 15,89.5 13.61,88.11 v1(13.61,86.39)
RTS_N: length 65.7
  TOP w0.3: Q2.2 49.85,54.15 v1(50.5,53.5) ; R9.2 55.5,50 v1(56,49.5) 78.3,49.5 80.05,48.95 96.42,32.57 U4.3
  BOTTOM w0.3: v1(50.5,53.5) 50.5,49.3 50.8,49 55.7,49 56,49.3 v1(56,49.5)
RTS_N_R: length 4.2
  TOP w0.3: Q3.1 49.7,48.85 50.85,50 R9.1
SPI_CS0: length 13.6
  TOP w0.3: J4.3 13.57,88.93 16,86.5 v1(17,86.5) ; v1(19.5,86.5) 20.5,86.5 22,85 U8.29
  BOTTOM w0.3: v1(17,86.5) v1(19.5,86.5)
SPI_CS1: length 52.4
  TOP w0.3: 30.5,95.5 v1(30.28,95.28) 29,94 27.8,94 27.5,93.7 27.5,77.91 25.7,76.11 U8.36 ; J5.P2 48.75,92.25 49,92.5 v1(49,94) ; v1(35,96) 35,97.7 35.3,98 42.34,98 42.64,97.7 42.64,96.64 v1(42.5,96.5)
  BOTTOM w0.3: v1(30.28,95.28) 34.28,95.28 v1(35,96) ; v1(49,94) 46,94 43.5,96.5 v1(42.5,96.5)
SPI_MISO: length 65.5
  TOP w0.3: v1(21,82.46) U8.31 ; v1(26,95.5) v1(26,97.5) ; v1(24.5,98) 21.3,98 21,97.7 v1(21,94) ; J5.P7 54.25,94.25 v1(55,95) ; v1(36,93.5) 36.5,94 v1(38,94)
  BOTTOM w0.3: v1(24.5,98) 25,97.5 v1(26,97.5) ; v1(26,95.5) 27,94.5 33.5,94.5 34.5,93.5 v1(36,93.5) ; v1(21,82.46) 21.5,82.96 21.5,90.5 21,91 v1(21,94) ; v1(55,95) 46.5,95 43.5,98 38.3,98 38,97.7 v1(38,94)
SPI_MOSI: length 114.1
  TOP w0.3: 22.32,74.84 21.16,74.84 20.5,75.5 20.5,77.2 20.2,77.5 v1(19.5,77.5) ; 22.32,74.84 U8.37 ; 22.32,74.84 21.5,74.02 21.5,65.5 v1(22,65) ; v1(41,64.5) 43.2,64.5 44,65.3 44,70.5 43.5,71 v1(43.5,71.5) ; v1(60,85) 59.5,85.5 59.5,89 59,89.5 59,97.5 58,98.5 v1(57,98.5) ; v1(49.5,96) 49.5,95 49.85,94.65 J5.P3 ; v1(17.5,78.5) 16,78.5 13.19,81.31 J4.6 ; v1(45.5,72) 48,72 50.5,74.5 53.2,74.5 53.5,74.8 53.5,78.2 53.8,78.5 58.7,78.5 59,78.8 v1(59,81.5)
  BOTTOM w0.3: v1(59,81.5) 60,82.5 v1(60,85) ; v1(49.5,96) 49.5,96.5 49,97 49,98 49.5,98.5 v1(57,98.5) ; v1(17.5,78.5) 18.5,77.5 v1(19.5,77.5) ; v1(22,65) 40.5,65 v1(41,64.5) ; v1(43.5,71.5) 45,71.5 v1(45.5,72)
SPI_SCK: length 67
  TOP w0.3: v1(14,78.77) J4.7 ; J5.P5 52.05,98.7 51.75,99 25.8,99 25.5,98.7 25.5,98.07 25,97.57 25,85.06 23.68,83.73 U8.30 19.77,83.73 v1(19.5,84)
  BOTTOM w0.3: v1(19.5,84) 19.23,83.73 17.73,83.73 15.5,81.5 15.5,80.27 v1(14,78.77)
STATUS_LED: length 36.6
  TOP w0.3: D5.A 7.7,87 8,86.7 8,54.8 8.3,54.5 R10.2
UART_RXD: length 110.8
  TOP w0.3: v1(75,54.5) 89,54.5 90.5,53 90.5,50 99,41.5 99,38 98,37 98,29.28 U4.1 ; v1(38.5,69) 38.5,62.5 40,60 v1(43.5,57.5) ; U8.34 v1(25.35,78.65)
  BOTTOM w0.3: v1(25.35,78.65) 26.85,78.65 31.5,74 34.86,74 38.23,70.64 v1(38.5,69) ; v1(43.5,57.5) 63.5,57.5 66.5,54.5 v1(75,54.5)
UART_TXD: length 122.3
  TOP w0.3: v1(63.5,35.5) 67.5,35.5 75,43 76.5,43 88.5,31 90.5,31 92,32.5 92,33 93,34 94,34 94.5,33.5 94.5,30.52 95.12,29.9 U4.5 ; v1(28,75) 28,51.5 33,46.5 33,42.3 33.3,42 35,42 35.5,41.5 35.5,37 36.5,36 39,36 v1(39.5,35.5) ; U8.35 v1(25.38,77.38)
  BOTTOM w0.3: v1(25.38,77.38) 25.62,77.38 v1(28,75) ; v1(39.5,35.5) v1(63.5,35.5)
USB_DN: length 26.2
  TOP w0.2: U4.16 89.92,23.3 89.72,23.5 88.5,23.5 88.22,23.23 88.22,20.77 v1(89,20) ; v1(85.15,12) 85.15,9.5 D4.2
  TOP w0.25: D4.2 85.45,9 85.95,8.5 85.95,5.42 85.85,5.32 J1.2
  BOTTOM w0.2: v1(89,20) 87.85,20 87.54,19.69 87.54,18.46 87.65,18.35 87.65,18.15 85.52,16.02 85.52,13.45 85.15,13.07 v1(85.15,12)
USB_DP: length 22.1
  TOP w0.2: v1(90.15,20) 89.28,20.87 U4.15 ; 87,9 86.5,9.5 86.5,11.8 v1(86.3,12)
  TOP w0.25: J1.3 86.5,5.32 86.4,5.42 86.4,8.5 86.9,9 D3.2
  BOTTOM w0.2: v1(86.3,12) 86.3,13.07 85.92,13.45 85.92,15.86 88.5,18.43 88.5,19.2 88.7,19.39 89.25,19.39 89.86,20 v1(90.15,20)
N00559: length 13.7
  TOP w0.3: U6.1 58.77,20.95 58.12,20.3 58.12,17.7 58.82,17 60.3,17 61.5,15.8 D1.C
N254022: length 18.3
  TOP w0.3: D6.A 95.5,16.5 94.5,15.5 81.38,15.5 81.16,15.73 81.16,16.27 80.77,16.66 79.64,16.66 R3.2
N255207: length 17.6
  TOP w0.3: R2.2 93.5,15 94,14.5 95.72,14.5 D7.A 96.5,14

## Copper pours and planes (outline as drawn; the poured copper is in the pictures)
GND on LAYER2: 1,99 99.5,99 99.5,1 1,1
P3V3 on LAYER3: 0.5,99.5 99.5,99.5 99.5,0.5 0.5,0.5
